# EAGLE board IVSTAGE (EAGLE 5.07)
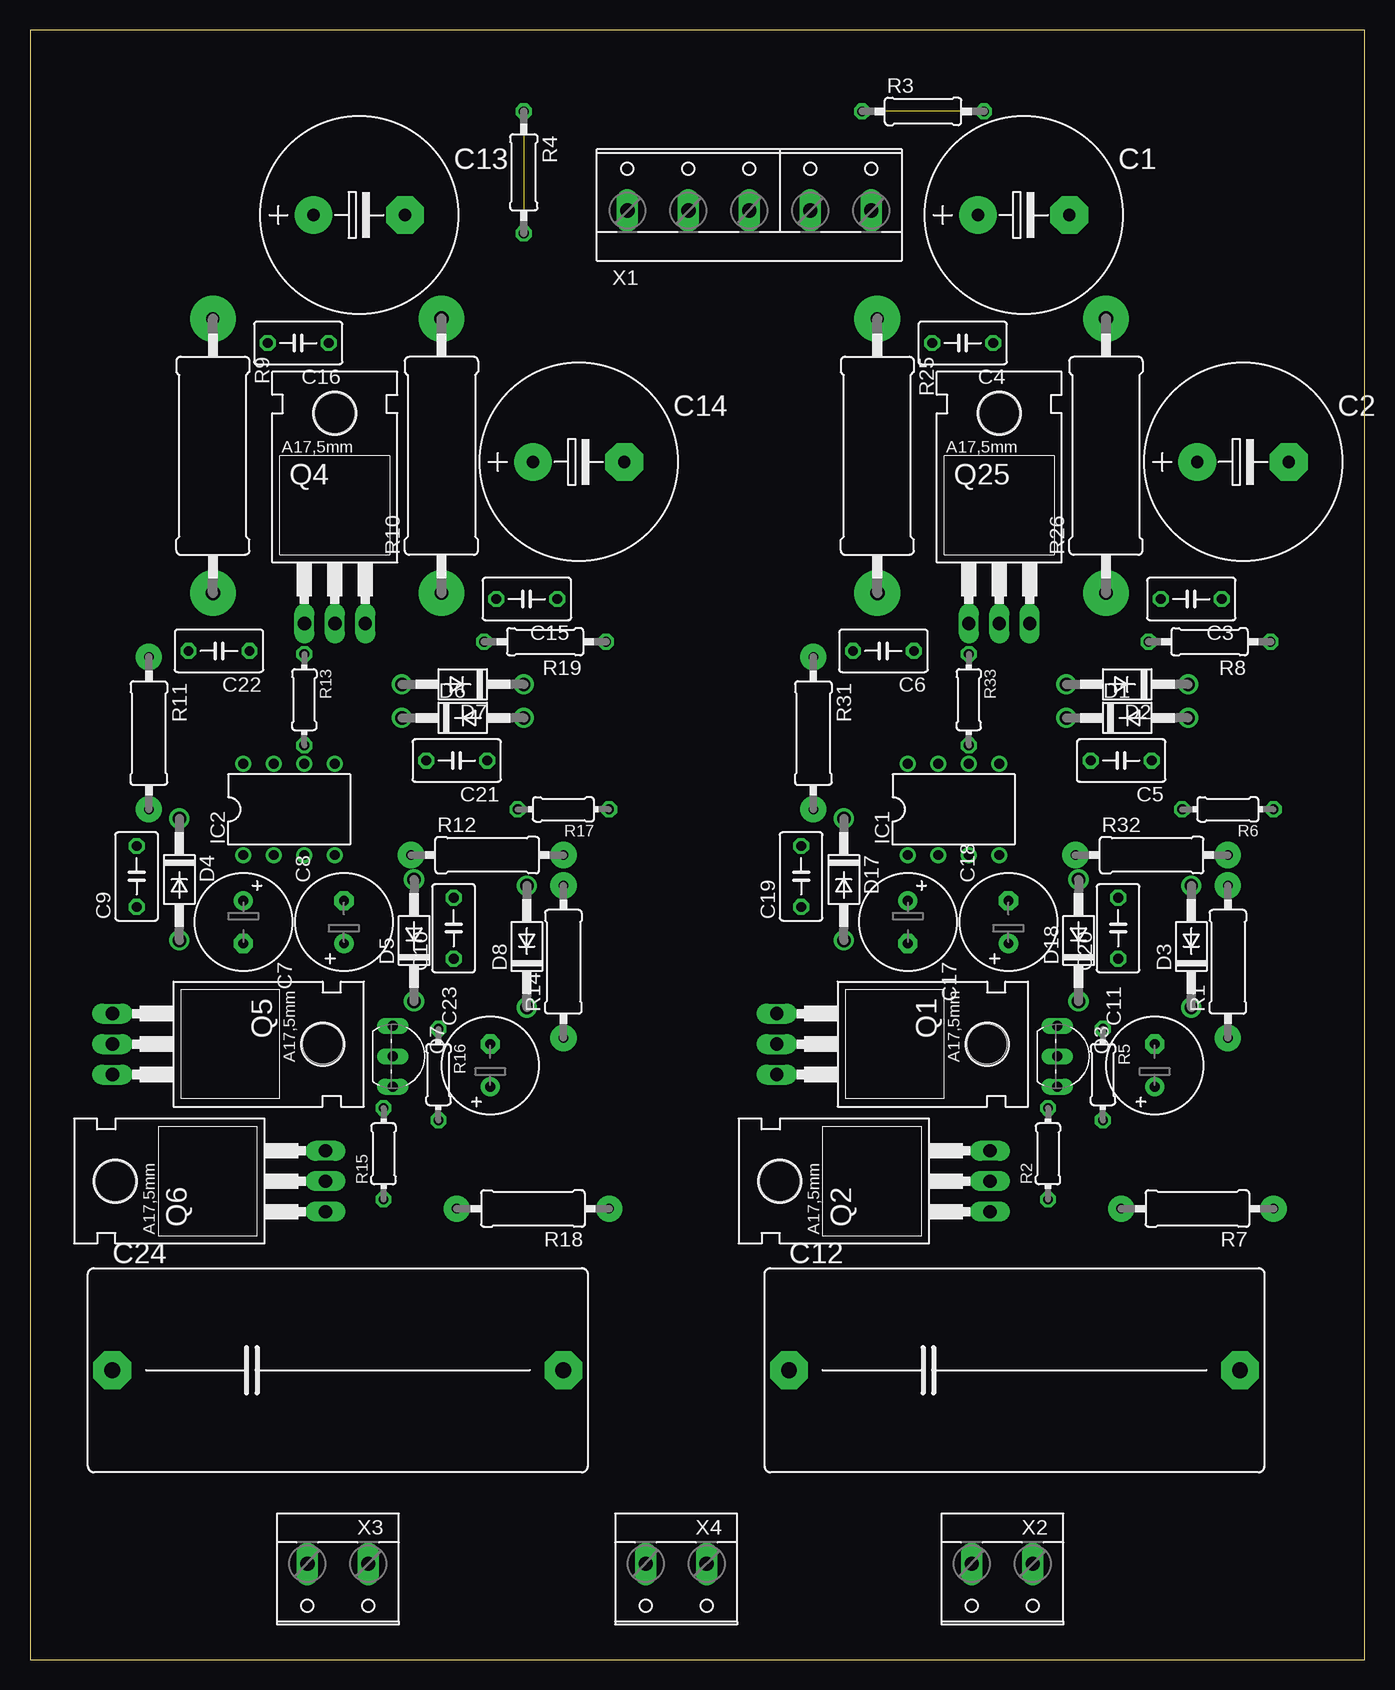
[diagram p0: board, top side]
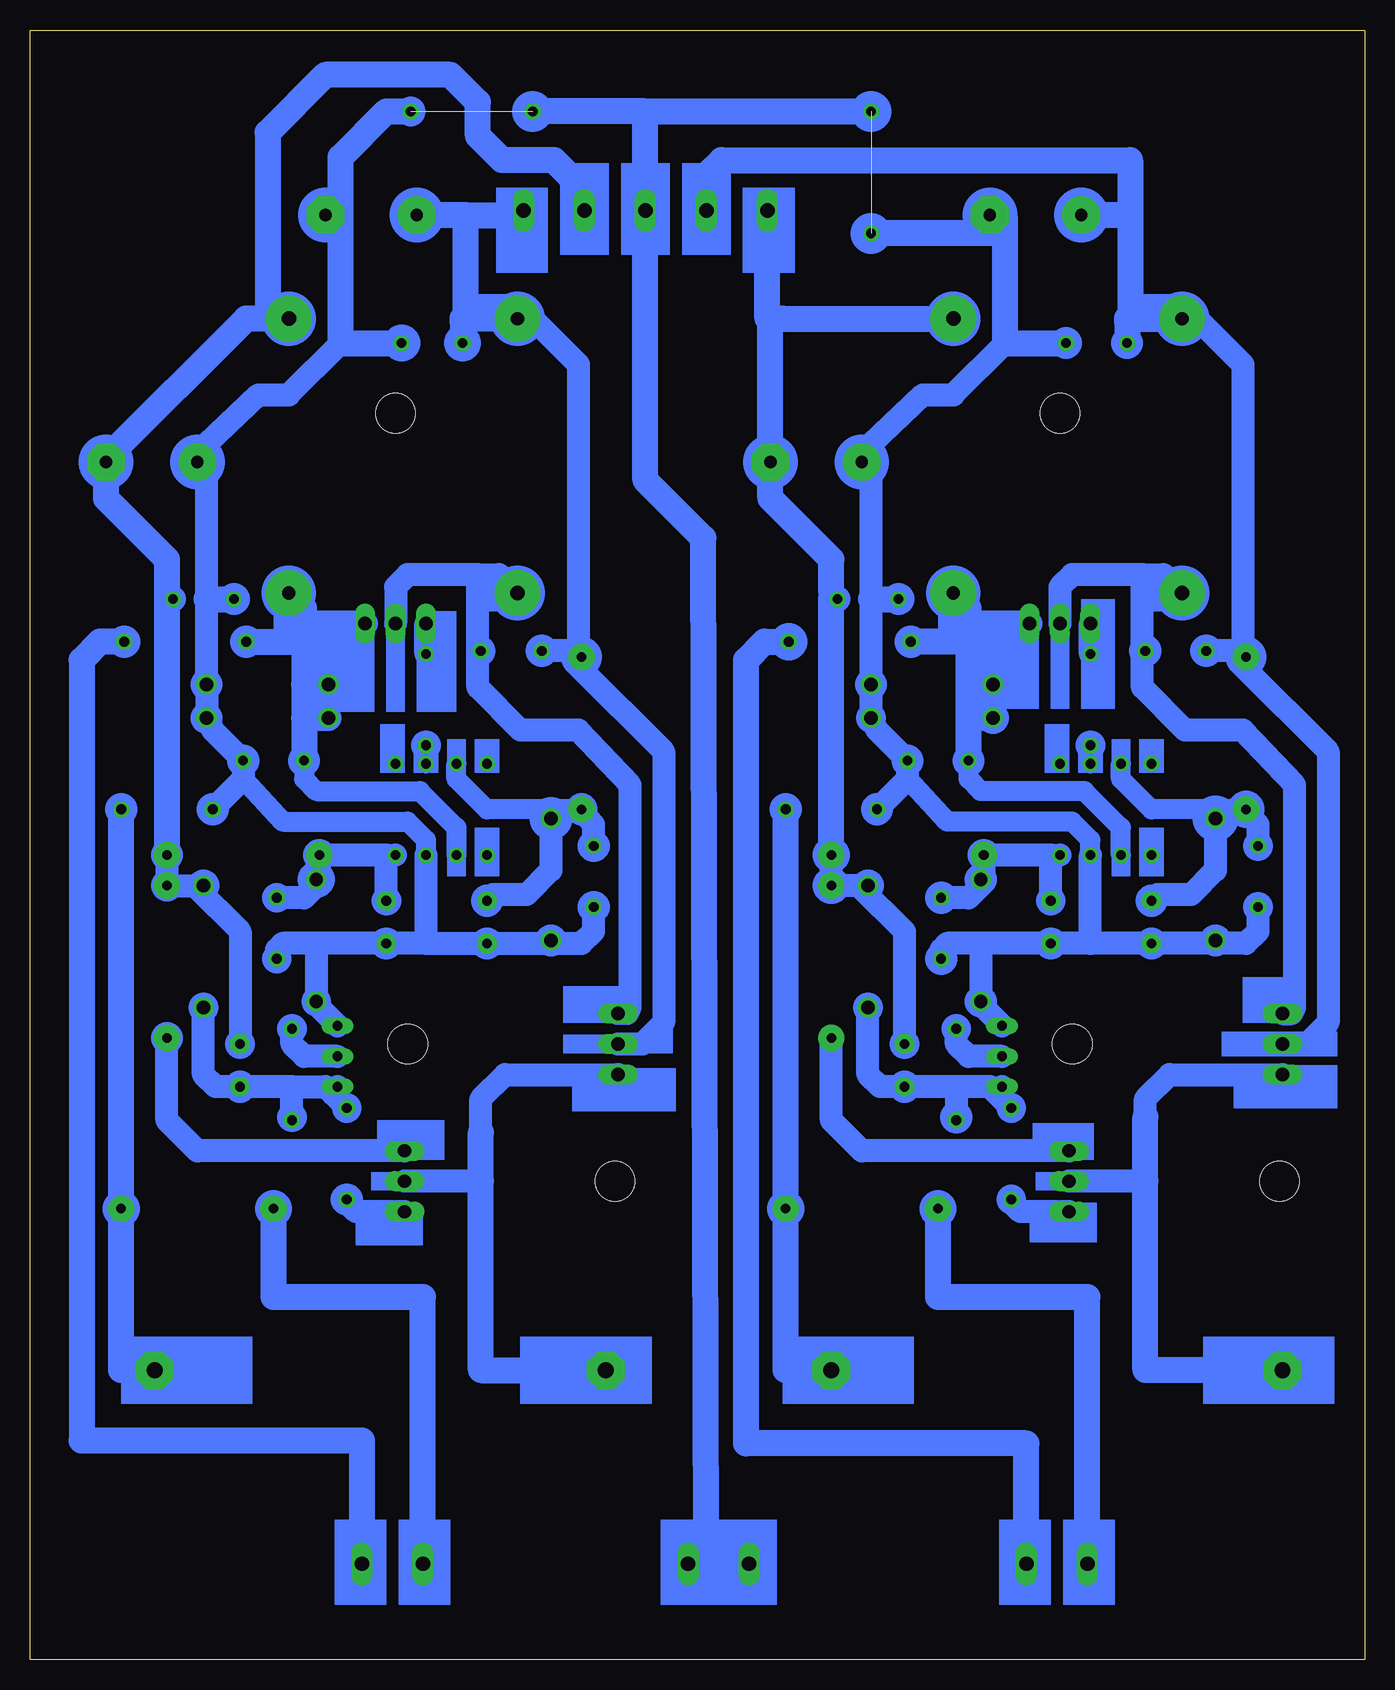
[diagram p1: board, bottom side, seen from below]

Size 111.23 x 135.81 mm. Coordinates in mm from the lower left corner, seen from the top.
Outline: 0,0 111.23,0 111.23,135.81 0,135.81 0,0
Copper layers (1*16): Top 0.035mm / dielectric 1.5mm / Bottom 0.035mm
Design rules "default": minimum track width 10mil, minimum drill 24mil, track to track 8mil, track to pad 8mil, pad to pad 8mil, via to via 8mil, smd to smd 8mil, copper to edge 40mil, drill to drill 8mil, minimum pad ring 10mil, minimum via ring 8mil, stop-mask expansion 4mil, vias tented up to drill 0mil, thermal gap 10mil

## Footprints (pad centres in the part's own frame; a part is rotated, then mirrored left to right if it is on the bottom)
E7,5-16 = drill 1.016 pad 3.15 round: + -3.81,0 | drill 1.016 pad 3.15 octagon: - 3.81,0
C050-035X075 = drill 0.813 octagon: 1 -2.54,0; 2 2.54,0
E3,5-8 = drill 0.813 pad 1.6 round: + -1.778,0 | drill 0.813 pad 1.6 octagon: - 1.778,0
C37.5B19 = drill 1.321 pad 3.15 octagon: 1 -18.796,0; 2 18.796,0
DO41-10 = drill 1.118 round: A 5.08,0; C -5.08,0
DIL08 = drill 0.813 pad 1.27 round: 1 -3.81,-3.81; 2 -1.27,-3.81; 3 1.27,-3.81; 4 3.81,-3.81; 5 3.81,3.81; 6 1.27,3.81; 7 -1.27,3.81; 8 -3.81,3.81
TO220BH = drill 1.118 long: D 0,-6.35; G -2.54,-6.35; S 2.54,-6.35 | hole 3.302: 0,11.176
TO92-EBC = drill 0.813 long: B 0,-1.27; C -2.54,-1.27; E 2.54,-1.27
0309/12 = drill 0.8 pad 2.184 round: 1 -6.35,0; 2 6.35,0
0204/7 = drill 0.813 octagon: 1 -3.81,0; 2 3.81,0
0207/10 = drill 0.813 octagon: 1 -5.08,0; 2 5.08,0
0617/22 = drill 1.1 pad 3.81 round: 1 -11.43,0 | drill 1.2 pad 3.81 round: 2 11.43,0
W237-5P = drill 1.194 long: 1 -10.16,-0.635; 2 -5.08,-0.635; 3 0,-0.635; 4 5.08,-0.635; 5 10.16,-0.635
W237-132 = drill 1.194 long: 1 -2.54,-0.635; 2 2.54,-0.635

## Placement (x,y rotation side)
C1  100uF  [E7,5-16]  82.8,120.4 0 top
C2  100uF  [E7,5-16]  101.09,99.82 0 top
C3  68nF  [C050-035X075]  96.77,88.39 180 top
C4  68nF  [C050-035X075]  77.72,109.73 180 top
C5  10nF  [C050-035X075]  90.93,74.93 180 top
C6  1n5  [C050-035X075]  71.12,84.07 180 top
C7  47uF  [E3,5-8]  17.78,61.47 270 top
C8  47uF  [E3,5-8]  26.16,61.47 90 top
C9  68nF  [C050-035X075]  8.89,65.28 90 top
C10  68nF  [C050-035X075]  35.31,60.96 90 top
C11  47uF  [E3,5-8]  93.73,49.53 90 top
C12  4u7  [C37.5B19]  82.04,24.13 0 top
C13  100uF  [E7,5-16]  27.43,120.4 0 top
C14  100uF  [E7,5-16]  45.72,99.82 0 top
C15  68nF  [C050-035X075]  41.4,88.39 180 top
C16  68nF  [C050-035X075]  22.35,109.73 180 top
C17  47uF  [E3,5-8]  73.15,61.47 270 top
C18  47uF  [E3,5-8]  81.53,61.47 90 top
C19  68nF  [C050-035X075]  64.26,65.28 90 top
C20  68nF  [C050-035X075]  90.68,60.96 90 top
C21  10nF  [C050-035X075]  35.56,74.93 180 top
C22  1n5  [C050-035X075]  15.75,84.07 180 top
C23  47uF  [E3,5-8]  38.35,49.53 90 top
C24  4u7  [C37.5B19]  25.65,24.13 0 top
D1  4148  [DO41-10]  91.44,78.49 0 top
D2  4148  [DO41-10]  91.44,81.28 180 top
D3  12V  [DO41-10]  96.77,59.44 90 top
D4  12V  [DO41-10]  12.45,65.02 270 top
D5  12V  [DO41-10]  32,59.94 90 top
D6  4148  [DO41-10]  36.07,78.49 0 top
D7  4148  [DO41-10]  36.07,81.28 180 top
D8  12V  [DO41-10]  41.4,59.44 90 top
D17  12V  [DO41-10]  67.82,65.02 270 top
D18  12V  [DO41-10]  87.38,59.94 90 top
IC1  LT1793  [DIL08]  76.96,70.87 0 top
IC2  LT1793  [DIL08]  21.59,70.87 0 top
Q1  NPN  [TO220BH]  68.58,51.31 270 top
Q2  NPN  [TO220BH]  73.66,39.88 90 top
Q3  PF5102  [TO92-EBC]  86.87,50.29 270 top
Q4  NPN  [TO220BH]  25.4,92.71 0 top
Q5  NPN  [TO220BH]  13.21,51.31 270 top
Q6  NPN  [TO220BH]  18.29,39.88 90 top
Q7  PF5102  [TO92-EBC]  31.5,50.29 270 top
Q25  NPN  [TO220BH]  80.77,92.71 0 top
R1  330  [0309/12]  99.82,58.17 90 top
R2  330R  [0204/7]  84.84,42.16 90 top
R3  0R  [0207/10]  74.42,129.03 0 top
R4  0R  [0207/10]  41.15,123.95 270 top
R5  150R  [0204/7]  89.41,48.77 270 top
R6  100K  [0204/7]  99.82,70.87 180 top
R7  196R  [0309/12]  97.28,37.59 180 top
R8  0R  [0207/10]  98.3,84.84 180 top
R9  2200  [0617/22]  15.24,100.33 270 top
R10  4531  [0617/22]  34.29,100.33 90 top
R11  3900  [0309/12]  9.91,77.22 270 top
R12  3900  [0309/12]  38.1,67.06 0 top
R13  330R  [0204/7]  22.86,80.01 270 top
R14  330  [0309/12]  44.45,58.17 90 top
R15  330R  [0204/7]  29.46,42.16 90 top
R16  150R  [0204/7]  34.04,48.77 270 top
R17  100K  [0204/7]  44.45,70.87 180 top
R18  196R  [0309/12]  41.91,37.59 180 top
R19  0R  [0207/10]  42.93,84.84 180 top
R25  2200  [0617/22]  70.61,100.33 270 top
R26  4531  [0617/22]  89.66,100.33 90 top
R31  3900  [0309/12]  65.28,77.22 270 top
R32  3900  [0309/12]  93.47,67.06 0 top
R33  330R  [0204/7]  78.23,80.01 270 top
X1  [W237-5P]  59.94,121.41 0 top
X2  [W237-132]  81.03,7.37 180 top
X3  [W237-132]  25.65,7.37 180 top
X4  [W237-132]  53.85,7.37 180 top

## Library data of the parts
C1-C11 C13-C23 R1-R19 R25 R26 R31-R33 = resistor
C12 C24 = capacitor-wima
D1-D8 D17 D18 = diode
IC1 IC2 = linear
Q1 Q2 Q4-Q6 Q25 = transistor-power
Q3 Q7 = transistor-npn
X1-X4 = con-wago-508

## Nets
0V: C1.- C2.+ C3.2 C4.1 C5.1 C17.- C18.+ C19.1 C20.1 D1.A D2.C D17.A D18.C IC1.3 Q3.C R3.1 R3.2 R4.1 R4.2 R6.2 X1.3
0V1: C7.- C8.+ C9.1 C10.1 C13.- C14.+ C15.2 C16.1 C21.1 D4.A D5.C D6.A D7.C IC2.3 Q7.C R17.2
N$1: C6.1 Q1.G Q25.D R25.2
N$2: Q2.S R1.1
N$3: C12.1 Q1.S Q2.D
N$5: C14.- C15.1 C23.- D8.A R10.2 R12.2 R14.2
N$6: Q2.G R2.1
N$7: C11.+ D3.C Q3.E R2.2 R5.2
N$8: C13.+ C16.2 C22.2 Q5.D R9.1 R11.1
N$9: Q3.B R5.1
N$10: C22.1 Q4.D Q5.G R9.2
N$11: C12.2 R6.1 R7.1
N$12: R8.1 X2.1
N$13: R7.2 X2.2
N$14: C21.2 D6.C D7.A IC2.2 Q4.S R10.1 R19.2
N$15: C8.- C10.2 D5.A IC2.4 R12.1
N$16: C7.+ C9.2 D4.C IC2.7 R11.2
N$17: Q4.G R13.1
N$18: IC2.6 R13.2
N$19: C24.1 Q5.S Q6.D
N$20: Q6.G R15.1
N$21: Q6.S R14.1
N$22: C23.+ D8.C Q7.E R15.2 R16.2
N$23: C2.- C3.1 C11.- D3.A R1.2 R26.2 R32.2 X1.4
N$24: Q7.B R16.1
N$25: C24.2 R17.1 R18.1
N$26: C1.+ C4.2 C6.2 Q1.D R25.1 R31.1 X1.5
N$27: R19.1 X3.1
N$28: R18.2 X3.2
N$33: C5.2 D1.C D2.A IC1.2 Q25.S R8.2 R26.1
N$57: C18.- C20.2 D18.A IC1.4 R32.1
N$58: C17.+ C19.2 D17.C IC1.7 R31.2
N$63: Q25.G R33.1
N$64: IC1.6 R33.2

## Tracks (layer width: path | path; a pad name or v marks a point on that pad's centre or on a via)
0V  (2 unrouted)
  Bottom 1.676: IC1.3 78.23,68.33 79.76,69.85 90.17,69.85 93.47,73.41
  Bottom 1.93: 85.34,109.73 89.66,105.41 92.2,105.41 96.52,101.35 96.52,99.82 96.52,88.39 D2.C D1.A 96.01,77.47 C5.1 93.47,73.41 R6.2 | 87.38,59.69 C18.+ 78.23,59.69 | 87.38,59.69 90.17,59.69 90.68,59.18 C20.1 | 78.23,59.69 C17.- 68.07,59.69 | 68.07,59.69 D17.A | C19.1 64.26,60.71 65.28,59.69 68.07,59.69 | IC1.3 78.23,59.69 | 87.38,59.69 D18.C 87.38,54.61 Q3.C
  Bottom 2.184: C2.+ 97.03,99.82 | C2.+ 97.54,99.82 | 96.52,99.82 C2.+ | 96.52,88.39 C3.2 | C4.1 85.34,109.73 85.34,120.14 | 85.34,120.14 85.34,125.22 81.53,129.03 R3.2 | C1.- 86.36,120.14 85.34,120.14 | 59.94,129.03 R3.1 | 59.94,129.03 X1.3 59.94,98.3 55.12,93.47 54.86,9.14 56.13,7.87 | 59.94,129.03 R4.1
0V1
  Bottom 0.406: 30.99,120.14 30.99,119.38 30.48,119.38 30.48,118.62 30.23,118.62 | 32.77,118.62 30.99,118.62 30.73,118.62 29.97,118.62 29.97,119.38
  Bottom 1.676: IC2.3 22.86,68.33 24.38,69.85 34.8,69.85 38.1,73.41
  Bottom 1.93: 29.97,109.73 34.29,105.41 36.83,105.41 41.15,101.35 41.15,99.82 41.15,88.39 D7.C D6.A 40.64,77.47 C21.1 38.1,73.41 R17.2 | 32,59.69 C8.+ 22.86,59.69 | 32,59.69 34.8,59.69 35.31,59.18 C10.1 | 22.86,59.69 C7.- 12.7,59.69 | 12.7,59.69 D4.A | C9.1 8.89,60.71 9.91,59.69 12.7,59.69 | 22.86,59.69 IC2.3 | 32,59.69 D5.C 32,54.61 Q7.C
  Bottom 2.184: C14.+ 41.66,99.82 | C14.+ 42.16,99.82 | 41.15,99.82 C14.+ | 41.15,88.39 C15.2 | C16.1 29.97,109.73 29.97,119.38 29.97,120.14 30.99,120.14 C13.-
N$1
  Bottom 1.93: R25.2 72.14,90.42 73.91,90.42 | 73.91,90.42 79.76,90.42 80.77,89.41 Q25.D | 73.91,90.42 73.91,84.33 C6.1 73.91,83.82 73.91,81.03 70.36,77.47 65.53,77.47 61.21,72.9 61.21,54.36 61.47,53.85 Q1.G
N$2
  Bottom 1.93: Q2.S 97.28,42.42 99.82,44.96 R1.1
N$3
  Bottom 1.93: 73.66,39.88 Q2.D | 73.66,43.94 73.66,46.74 71.63,48.77 Q1.S
  Bottom 2.184: 73.66,43.94 73.66,39.88 73.66,24.13 C12.1
N$5
  Bottom 1.93: R12.2 R14.2 42.16,64.52 | C23.- 38.35,60.71 42.16,64.52 | 42.16,64.52 D8.A
  Bottom 2.184: R12.2 44.45,88.65 44.2,88.39 C15.1 44.45,88.9 44.45,91.69 49.53,96.77 C14.- 49.53,111.76 | R10.2 48.51,111.76 49.53,111.76 | 49.78,120.9 49.78,111.76 49.53,111.76
N$6
  Bottom 1.93: Q2.G 84.07,37.34 84.84,38.1 R2.1
N$7
  Bottom 1.93: 85.98,47.12 R2.2 | 85.98,47.12 86.61,47.75 89.41,47.75 | 89.41,47.75 C11.+ 95.76,47.75 96.77,48.77 D3.C | Q3.E 85.98,47.37 85.98,47.12 | R5.2 89.41,47.75
N$8
  Bottom 1.93: 10.16,84.07 10.16,107.95 13.97,111.76 R9.1 | 10.16,84.07 R11.1 | 10.16,84.07 C22.2 | Q5.D 4.83,51.31 3.05,53.09 3.05,75.69 10.16,82.8 10.16,84.07
  Bottom 2.184: 19.56,120.4 C13.+ | C16.2 19.81,111.51 19.56,111.76 R9.1 19.81,111.76 19.56,112.01 19.56,119.89 19.56,120.4 | 54.86,120.9 54.86,123.7 53.59,124.97 19.56,124.97 19.56,120.4
N$9
  Bottom 1.93: Q3.B 88.39,50.29 89.41,51.31 R5.1
N$10
  Bottom 1.93: R9.2 16.76,90.42 18.54,90.42 | 18.54,90.42 24.38,90.42 25.4,89.41 Q4.D | 18.54,90.42 18.54,84.33 C22.1 18.54,83.82 18.54,81.03 14.99,77.47 10.16,77.47 5.84,72.9 5.84,54.36 6.1,53.85 Q5.G
N$11
  Bottom 2.184: C12.2 103.63,24.13 R7.1 R6.1
N$12
  Bottom 2.184: R8.1 105.41,84.84 106.93,83.31 106.93,18.29 83.57,18.29 X2.1
N$13
  Bottom 2.184: X2.2 78.49,30.23 90.93,30.23 R7.2
N$14
  Bottom 1.676: IC2.2 20.32,69.34 23.37,72.39 32,72.39 33.02,73.41 C21.2
  Bottom 2.184: 33.02,84.84 33.02,86.36 | 33.02,81.28 33.02,84.84 | 33.02,78.49 33.02,81.28 | C21.2 33.02,78.49 | 33.02,86.36 Q4.S | R10.1 33.02,87.63 33.02,86.36 | 33.02,81.28 D7.A | 33.02,78.49 D6.C | 33.02,84.84 R19.2
N$15
  Bottom 1.93: 26.16,67.06 IC2.4 | 26.16,67.06 R12.1 31.75,65.02 | C8.- 26.16,67.06 | 31.75,65.02 D5.A | C10.2 33.02,63.5 31.75,64.77 31.75,65.02
N$16
  Bottom 1.676: R11.2 12.45,70.87 17.78,70.87 20.32,73.41 IC2.7
  Bottom 1.93: C9.2 8.89,69.6 R11.2 | 12.45,70.87 D4.C 12.45,65.79 14.48,63.75 17.27,63.75 C7.+
N$17
  Bottom 1.93: R13.1 Q4.G
N$18
  Bottom 1.676: IC2.6 R13.2
N$19
  Bottom 1.93: 18.29,39.88 Q6.D | 18.29,45.21 18.29,46.74 16.26,48.77 Q5.S
  Bottom 2.184: 18.29,45.21 18.29,39.88 18.29,24.13 C24.1
N$20
  Bottom 1.93: Q6.G 28.7,37.34 29.46,38.1 R15.1
N$21
  Bottom 1.93: Q6.S 41.91,42.42 44.45,44.96 R14.1
N$22
  Bottom 1.93: 30.61,47.12 R15.2 | 30.61,47.12 31.24,47.75 34.04,47.75 | 34.04,47.75 C23.+ 40.39,47.75 41.4,48.77 D8.C | Q7.E 30.61,47.37 30.61,47.12 | 34.04,47.75 R16.2
N$23
  Bottom 1.93: R32.2 R1.2 97.54,64.52 | C11.- 93.73,60.71 97.54,64.52 | 97.54,64.52 D3.A
  Bottom 2.184: R32.2 99.82,88.65 99.57,88.39 C3.1 99.82,88.9 99.82,91.69 104.9,96.77 C2.- 104.9,100.08 93.22,111.76 91.44,111.76 | 91.44,111.76 R26.2 | X1.4 65.02,122.43 67.56,124.97 71.88,124.97 73.91,127 73.91,129.79 76.2,132.08 86.61,132.08 91.44,127.25 91.44,111.76
N$24
  Bottom 1.93: Q7.B 33.02,50.29 34.04,51.31 R16.1
N$25
  Bottom 2.184: C24.2 48.26,24.13 R18.1 R17.1
N$26
  Bottom 1.93: 65.53,84.07 65.53,107.95 69.34,111.76 R25.1 | 65.53,84.07 R31.1 | 65.53,84.07 C6.2 | Q1.D 60.2,51.31 58.42,53.09 58.42,75.69 65.53,82.8 65.53,84.07
  Bottom 2.184: 70.1,121.41 X1.5 70.48,120.4 74.93,120.4 | 74.93,120.4 C1.+ | C4.2 75.18,111.51 74.93,111.76 R25.1 75.18,111.76 74.93,112.01 74.93,120.4
N$27
  Bottom 2.184: R19.1 50.04,84.84 51.56,83.31 51.56,18.03 28.19,18.03 X3.1
N$28
  Bottom 2.184: X3.2 23.11,30.23 35.56,30.23 R18.2
N$33
  Bottom 1.676: IC1.2 75.69,69.34 78.74,72.39 87.38,72.39 88.39,73.41 C5.2
  Bottom 2.184: 88.39,84.84 88.39,86.36 | 88.39,84.84 88.39,81.28 | 88.39,81.28 88.39,78.49 | 88.39,78.49 C5.2 | 88.39,86.36 Q25.S | R26.1 88.39,87.63 88.39,86.36 | 88.39,81.28 D2.A | 88.39,78.49 D1.C | R8.2 88.39,84.84
N$57
  Bottom 1.93: 81.53,67.06 IC1.4 | 81.53,67.06 R32.1 87.12,65.02 | C18.- 81.53,67.06 | 87.12,65.02 D18.A | C20.2 88.39,63.5 87.12,64.77 87.12,65.02
N$58
  Bottom 1.676: R31.2 67.82,70.87 73.15,70.87 75.69,73.41 IC1.7
  Bottom 1.93: C19.2 64.26,69.6 R31.2 | 67.82,70.87 D17.C 67.82,65.79 69.85,63.75 72.64,63.75 C17.+
N$63
  Bottom 1.93: R33.1 Q25.G
N$64
  Bottom 1.676: IC1.6 R33.2
S$2
  Bottom 2.184: 30.23,118.87 41.4,118.87
S$3
  Bottom 2.184: 51.56,8.13 56.13,8.13
(copper drawn outside any net)
  shapes: Bottom area x56, Bottom circle x113